# Altium PCB receiver.PcbDoc
Units mil, origin at the board's own origin, x right, y up, seen from the top; angles counter-clockwise.
Board outline 1410 x 1965 mil, 2 copper layers (Top Layer, Bottom Layer); 5 components, 8 nets, 50 pads, 0 vias.
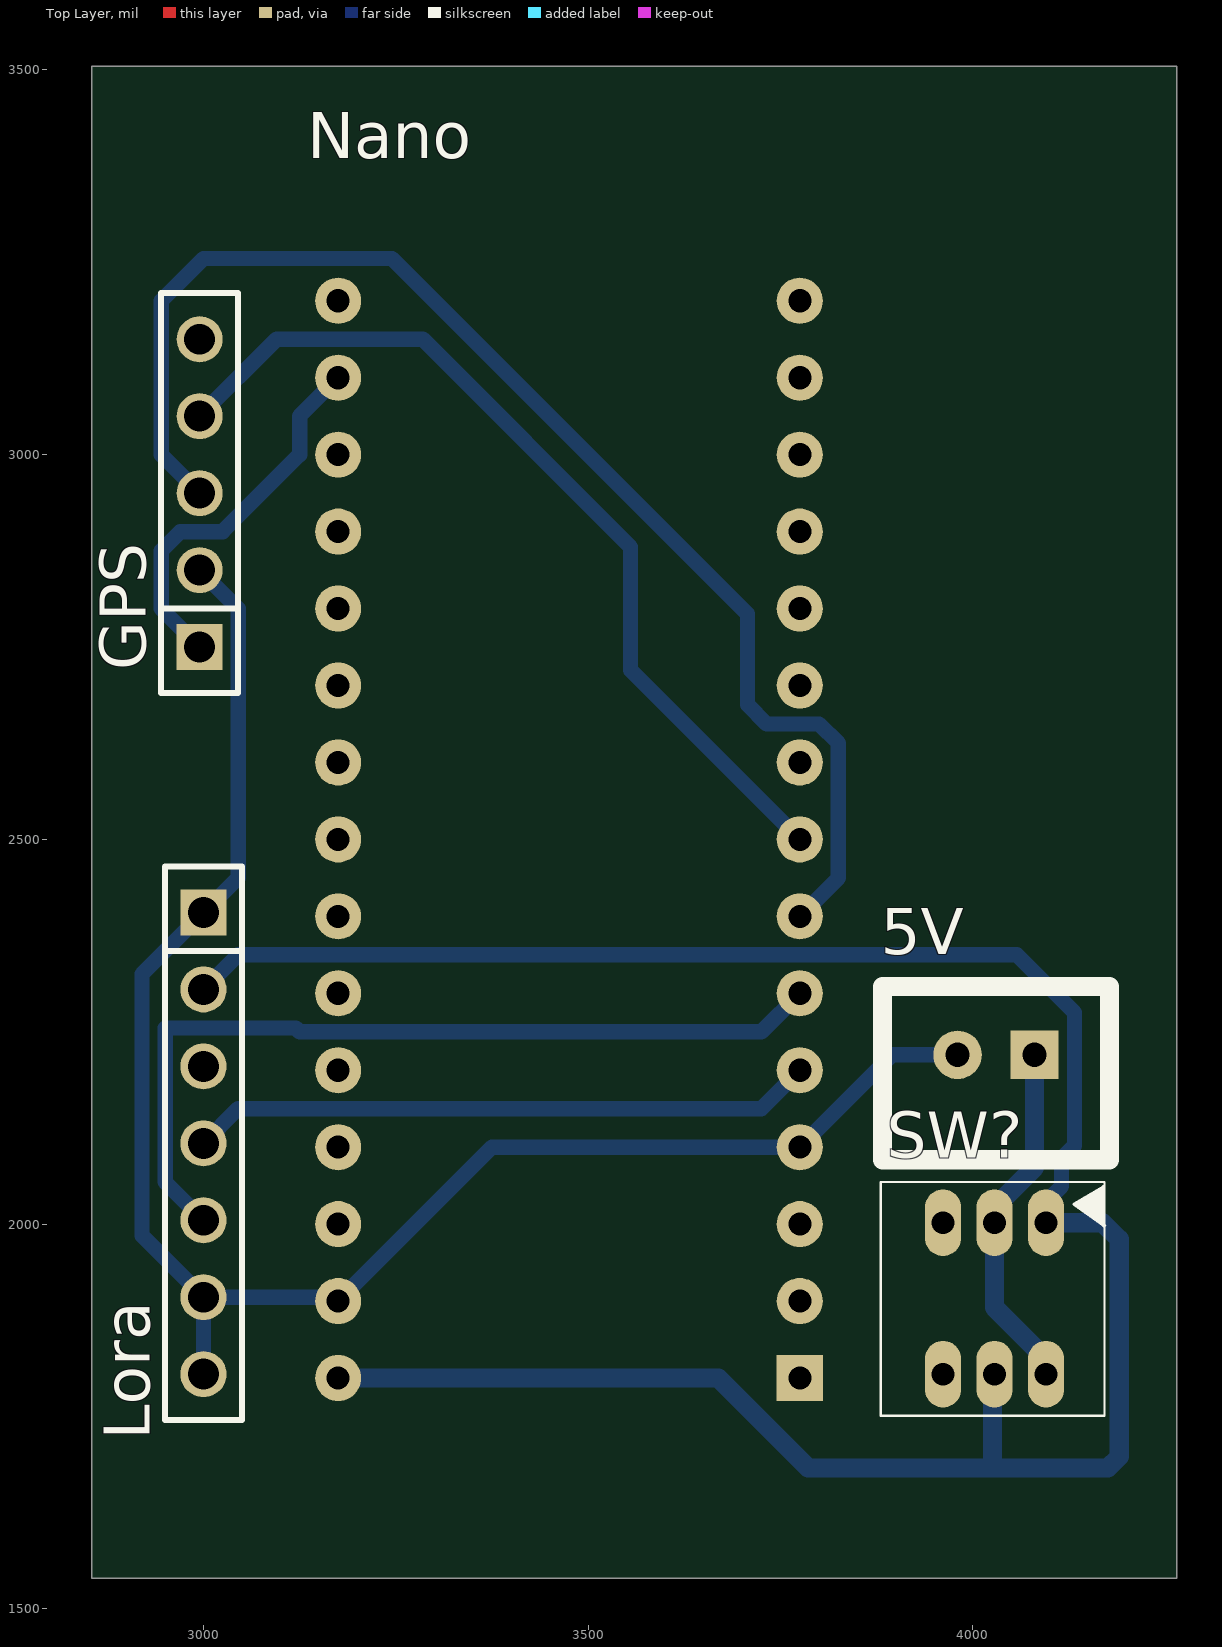
[diagram p0: Top Layer view]
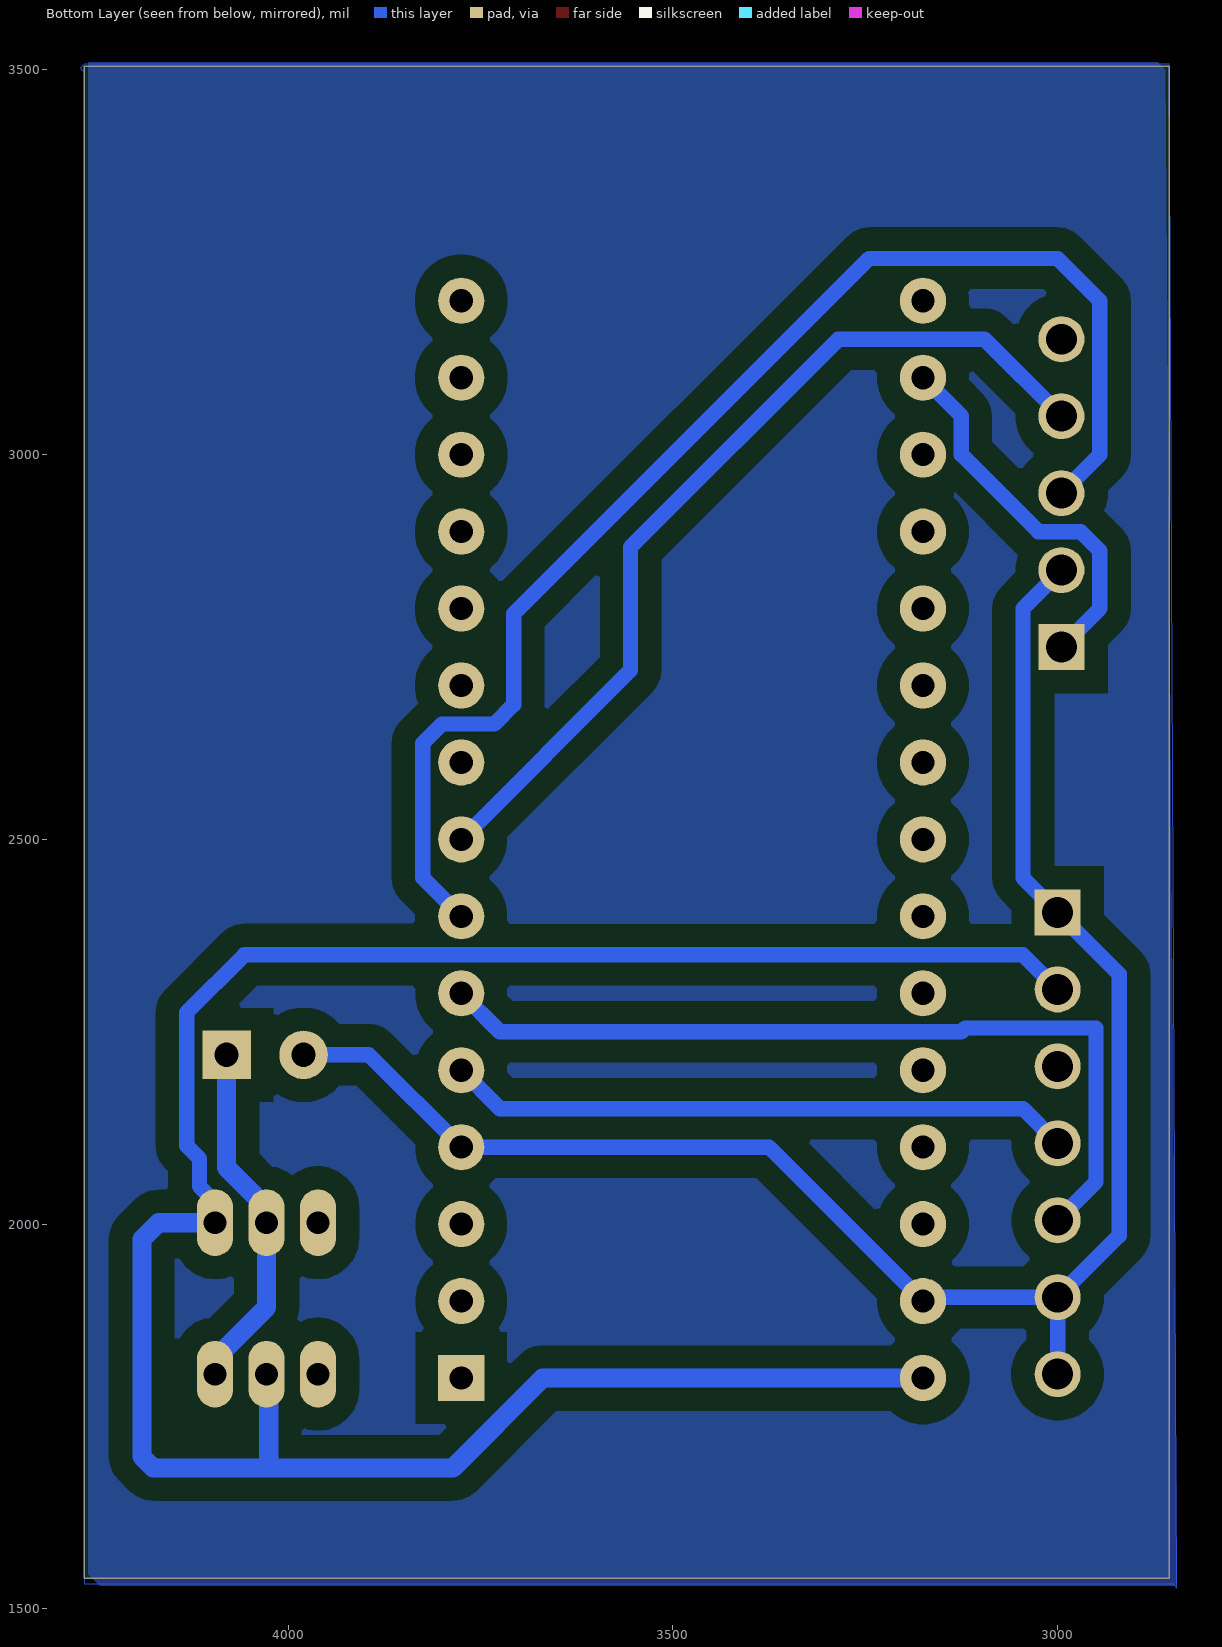
[diagram p1: Bottom Layer view, seen from below]
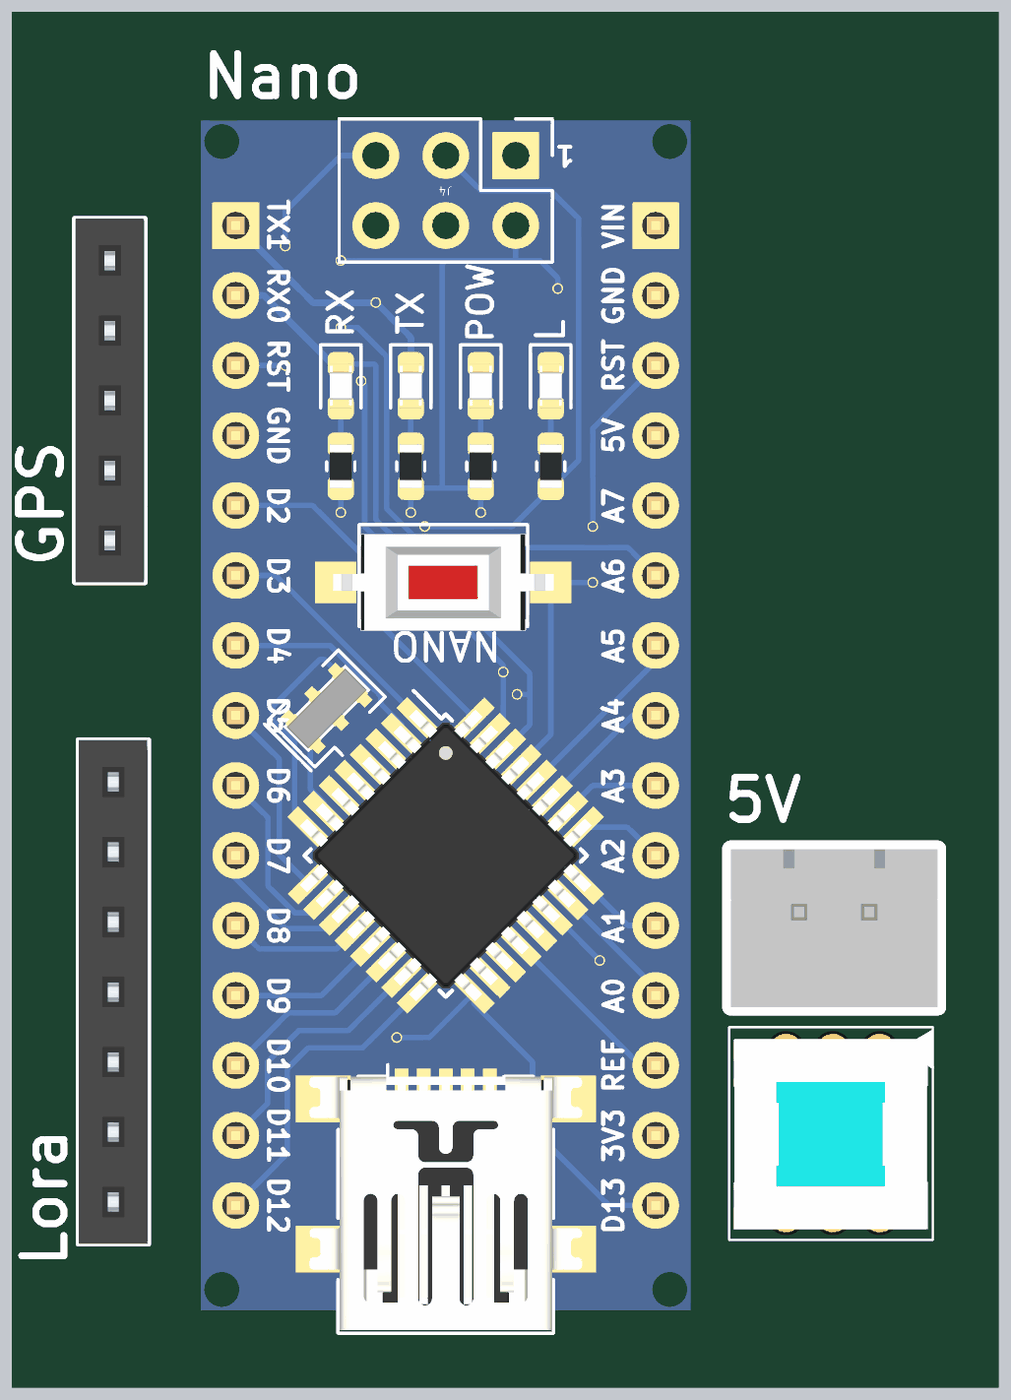
[diagram p2: 3D render of the assembled board from above, using the file's embedded part models]

## Layer stack, top to bottom
Top Solder: solder mask 0.4, Solder Resist, Dk 3.5
Top Layer: signal copper 1.4
Dielectric 1: dielectric 12.6, FR-4, Dk 4.8
Bottom Layer: signal copper 1.4
Bottom Solder: solder mask 0.4, Solder Resist, Dk 3.5

## Board outline
2855,1540 4265,1540 4265,3505 2855,3505

## Design rules (kind name [scope] priority, off if disabled: settings)
Clearance [All] p1: gap=10 ignorepadtopadclearanceinfootprint=FALSE except(0: Arc-Hole Track-Hole SMDPad-Hole THPad-Hole Via-Hole Fill-Hole Poly-Hole Region-Hole Text-Hole; 30: Arc-Fill Arc-Poly Arc-Region Track-Fill Track-Poly Track-Region SMDPad-Fill SMDPad-Poly SMDPad-Region THPad-Fill THPad-Poly THPad-Region Via-Fill Via-Poly Via-Region Fill-Fill Fill-Poly Fill-Region Fill-Gold Plating Poly-Poly Poly-Region Poly-Gold Plating Region-Region Region-Gold Plating)
PolygonConnect [All] p1: connectstyle=Relief reliefconductorwidth=10 reliefentries=4 polygonreliefangle="90 Angle" airgapwidth=10
RoutingLayers [All] p1: top layer_v5=FALSE bottom layer_v5=TRUE
RoutingVias [All] p1: holewidth=15.75 width=31.5 viastyle="Through Hole" minholewidth=15.75 minwidth=31.5 maxholewidth=15.75 maxwidth=31.5
SolderMaskExpansion [All] p1: expansion=4 istentingtop=FALSE
Width [All] p1: maxlimit=25 minlimit=20 preferedwidth=20
29 further rules are at their usual default settings.

## Classes and differential pairs
component class Sheet1: 5V Lora Nano SW?

## Components (designator, comment, footprint, x,y, rotation, side; value= is the part's Value field where it differs from the comment)
5V "Header 2P 2.54 Duc Thang" XH2.54M-2 4080,2220 r180 top
GPS "Neo 6M" "JP 1x5 CT" 2995,2750 r90 top (schematic designator JP?)
Lora "Lora E32" "JP 1x7 CT" 3000,2405 r270 top (schematic designator JP?)
Nano "Nano" "Arduino nano" 3835,1640 r90 top (schematic designator A?)
SW? "INI PUSH BUTTON SWITCH 4-PIN" SW_70_31.5D47_TH_ST 4095,2001.85 r180 top

## Footprints (in the part's own frame and the unit in brackets; to place one, negate y for a bottom-side part, rotate by r counter-clockwise, add the part's x,y. Pads: shape width x height; smd on the part's side, far side on the other; paste and mask are expansions set on the pad)
"Arduino nano" [mil] "arduino nano"
  rect 60x60 hole 30: 0(160,60)
  round 60 hole 30: 1(260,60) 2(360,60) 3(460,60) 4(560,60) 5(660,60) 6(760,60) 7(860,60) 8(960,60) 9(1060,60) 10(1160,60) 11(1260,60) 12(1360,60) 13(1460,60) 14(1560,60) 15(1560,660) 16(1460,660) 17(1360,660) 18(1260,660) 19(1160,660) 20(1060,660) 21(960,660) 22(860,660) 23(760,660) 24(660,660) 25(560,660) 26(460,660) 27(360,660) 28(260,660) 29(160,660)
  body extent -25,10 1715,710, height 507
"JP 1x5 CT" [mm]
  rect 1.52x1.52 hole 1.02: 1(0,0)
  round 1.52 hole 1.02: 2(2.54,0) 3(5.08,0) 4(7.62,0) 5(10.16,0)
  silkscreen extent -1.52,-1.27 11.68,1.27, body extent -1.52,-1.25 11.68,1.25, height 8.51
"JP 1x7 CT" [mm] "7 row, straight, gold plating"
  rect 1.52x1.52 hole 1.02: 1(0,0)
  round 1.52 hole 1.02: 2(2.54,0) 3(5.08,0) 4(7.62,0) 5(10.16,0) 6(12.7,0) 7(15.24,0)
  silkscreen extent -1.52,-1.27 16.76,1.27, body extent -1.52,-1.25 16.76,1.25, height 8.51
SW_70_31.5D47_TH_ST [mm] "CASE: TH"
  oval 1.2x2.2 hole 0.75: 0(3.4,5) 0(3.4,0) 1(0,0) 2(1.7,0) 3(1.7,5) 4(0,5)
  silkscreen extent -1.98,-1.35 5.46,6.38, body extent -1.74,-0.91 5.3,5.99, height 13.54
XH2.54M-2 [mm]
  rect 1.6x1.6 hole 0.8: 1(0,0)
  round 1.6 hole 0.8: 2(2.54,0)
  silkscreen extent -2.48,-2.26 5.02,3.46, body extent -2.48,-2.26 5.02,3.48, height 6.91

## Part data
5V: "Cắm", Chung_Loai=Cắm, Don_Vi=Con, Ma_Hang=MH001283, Ten_Linh_Kien="Header 2P XH2.54-2P Đực Thẳng"
GPS: library part "JP 1x5 2.54 Cai Thang", "Cắm", Chung_Loai=Cắm, Don_Vi=Con, Ma_Hang=MH004006, Ten_Linh_Kien="Jump Đơn Cái 2.54MM 1x20P Thẳng"
Lora: library part "JP 1x7 2.54 Cai Thang", "Cắm", Chung_Loai=Cắm, Don_Vi=Con, Ma_Hang=MH004006, Ten_Linh_Kien="Jump Đơn Cái 2.54MM 1x20P Thẳng"
Nano: library part "Arduino Nano"
SW?: library part SW2_BUTT-4-TH, "Tactile Switches MINI PUSH BUTTON SWITCH 4-PIN QTY. 4", Alternate Part Number-1=NA, Case/Package=TH, Manufacturer=Gravitech, Manufacturer Part Number=BUTT-4, Supplier Part Number-1=BUTT-4, Supplier-1="SP ROAD"

## Nets (pads, with @x,y where several pads share a name; then routed paths per layer and width w, separated by ;. In a path a pad name is that pad's centre, name@x,y a point inside that pad or via, vN(x,y) a via of type N, cw(c..) or ccw(c..) an arc to the next point about the centre after c; other vN are vias at no path point)
3V3: GPS.1 Nano.16 | length 498.2
  Bottom Layer w20: GPS.1 2945,2800 2945,2875 2970,2900 3025,2900 3125,3000 3125,3050 Nano.16
GND: 5V.2 GPS.2 Lora.1 Lora.6 Lora.7 Nano.3 Nano.28 | length 2265.2
  Bottom Layer w20: GPS.2 3045,2800 3045,2450 Lora.1 2920.08,2325.08 2920.08,1984.92 Lora.6 ; Lora.7 Lora.6 ; 5V.2 3895,2220 Nano.3 3375,2100 Nano.28 3170,1905 Lora.6
Net5V_1: 5V.1 SW?.2 SW?.4 | length 464.2
  Bottom Layer w25: 5V.1 4080,2073.47 4028.07,2021.54 SW?.2 4028.07,1891.62 4095,1824.68 SW?.4
RX1: GPS.4 Nano.7 | length 1184.4
  Bottom Layer w20: GPS.4 3095,3150 3285,3150 3555,2880 3555,2720 Nano.7
RX2: Lora.5 Nano.5 | length 1118.3
  Bottom Layer w20: Lora.5 2950.08,2054.92 2950.08,2254.92 3120.08,2254.92 3125,2250 3725,2250 Nano.5
TX1: GPS.3 Nano.6 | length 1749.3
  Bottom Layer w20: GPS.3 2945,3000 2945,3200 3000,3255 3245,3255 3707,2793 3707,2675 3732,2650 3800,2650 3825,2625 3825,2450 Nano.6
TX2: Lora.4 Nano.4 | length 814.4
  Bottom Layer w20: Lora.4 3045,2150 3725,2150 Nano.4
Vin: Lora.2 Nano.29 SW?.1 SW?.3 | length 3049
  Bottom Layer w20: Lora.2 3045,2350 4057,2350 4132,2275 4132,2102 4115.16,2085.16 4115.16,2049.06 4095,2028.91 SW?.1
  Bottom Layer w25: Nano.29 3669,1800 3785.82,1683.18 4025.34,1683.18 ; SW?.3 4025.34,1802.27 4025.34,1683.18 ; SW?.1 4168.51,2001.85 4190,1980.36 4190,1697.82 4175.36,1683.18 4025.34,1683.18
pads on no net: GPS.5 Lora.3 Nano.0 Nano.1 Nano.2 Nano.8 Nano.9 Nano.10 Nano.11 Nano.12 Nano.13 Nano.14 Nano.15 Nano.17 Nano.18 Nano.19 Nano.20 Nano.21 Nano.22 Nano.23 Nano.24 Nano.25 Nano.26 Nano.27 SW?.0

## Polygon pours and split planes (outlines as drawn)
no net on Bottom Layer "NONET_L02_P001" (solid, remove dead copper, pour order 1): 2855,3507.5 4265,3507.5 4270,3502.5 4265,3497.5 4265,1532.5 2850,1532.5 2845,1527.5
no net on Bottom Layer "NONET_L02_P000" (solid, pour order 0): 2860,3500 2870,3510 4260,3510 4260,1545 4245,1530 2845,1530